# Altium PCB PCB2.PcbDoc
Units mm, origin at the board's own origin, x right, y up, seen from the top; angles counter-clockwise.
Board outline 86 x 54.03 mm, 2 copper layers (Top Layer, Bottom Layer); 73 components, 64 nets, 256 pads, 283 vias.
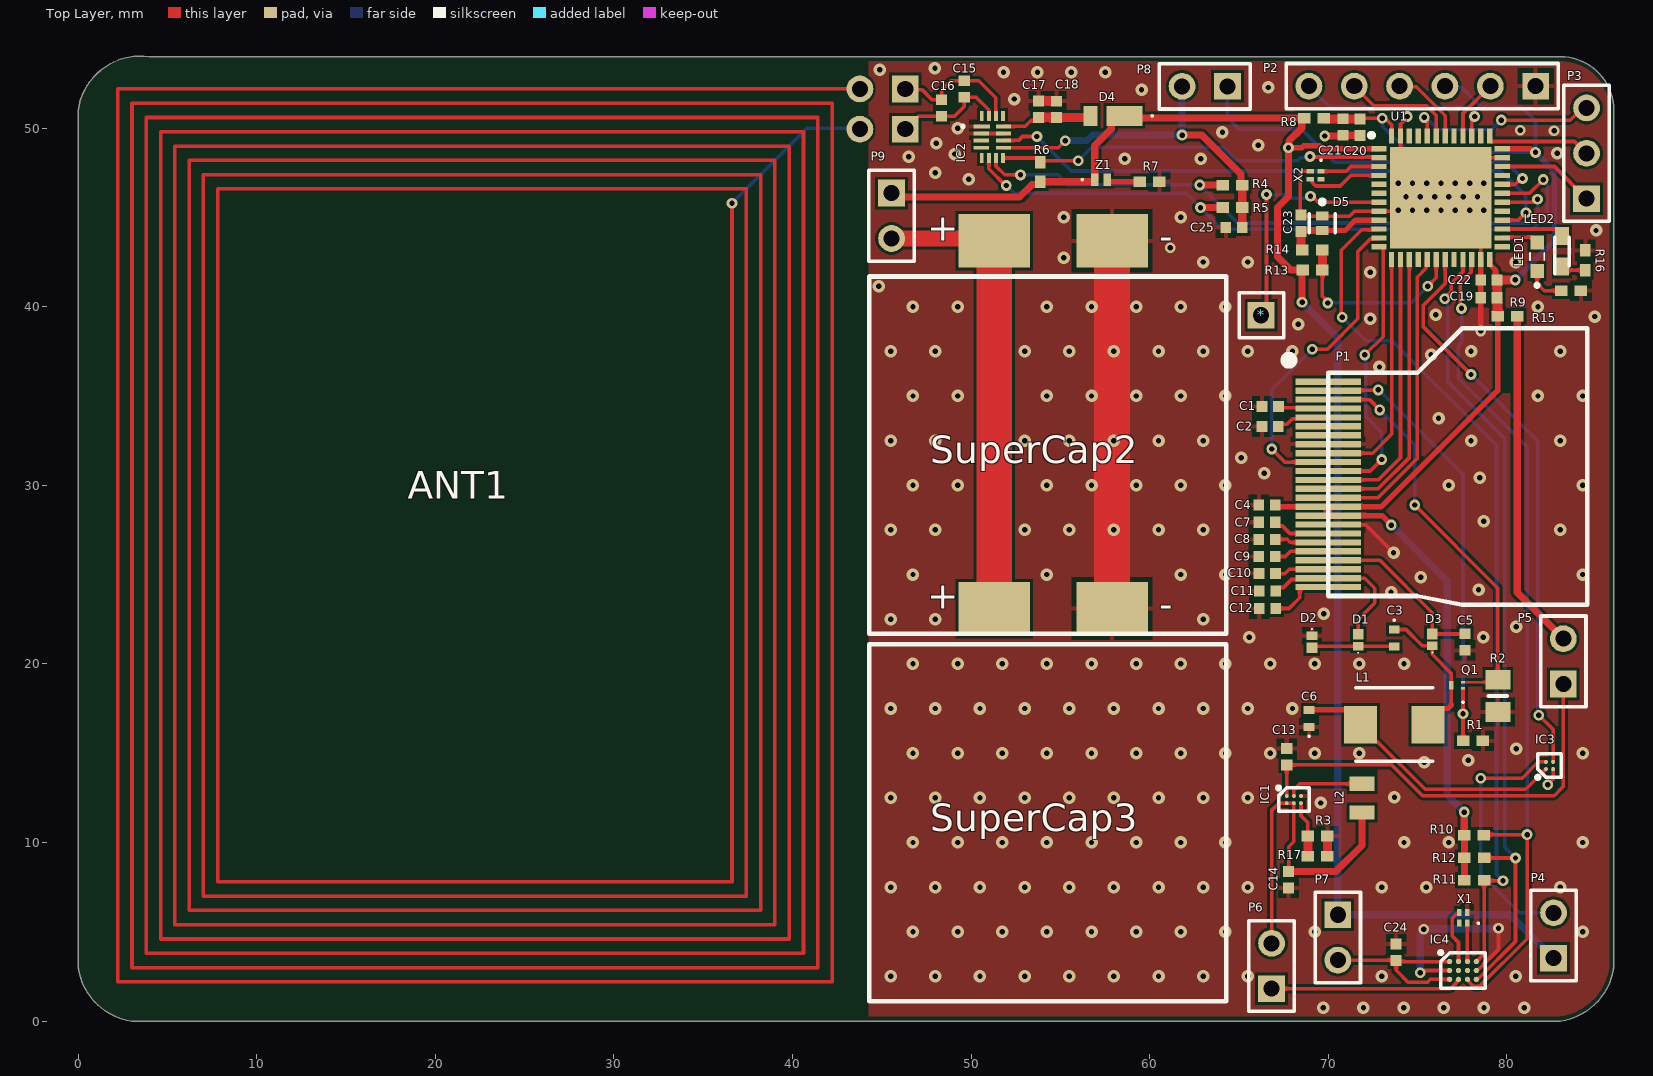
[diagram p0: Top Layer view]
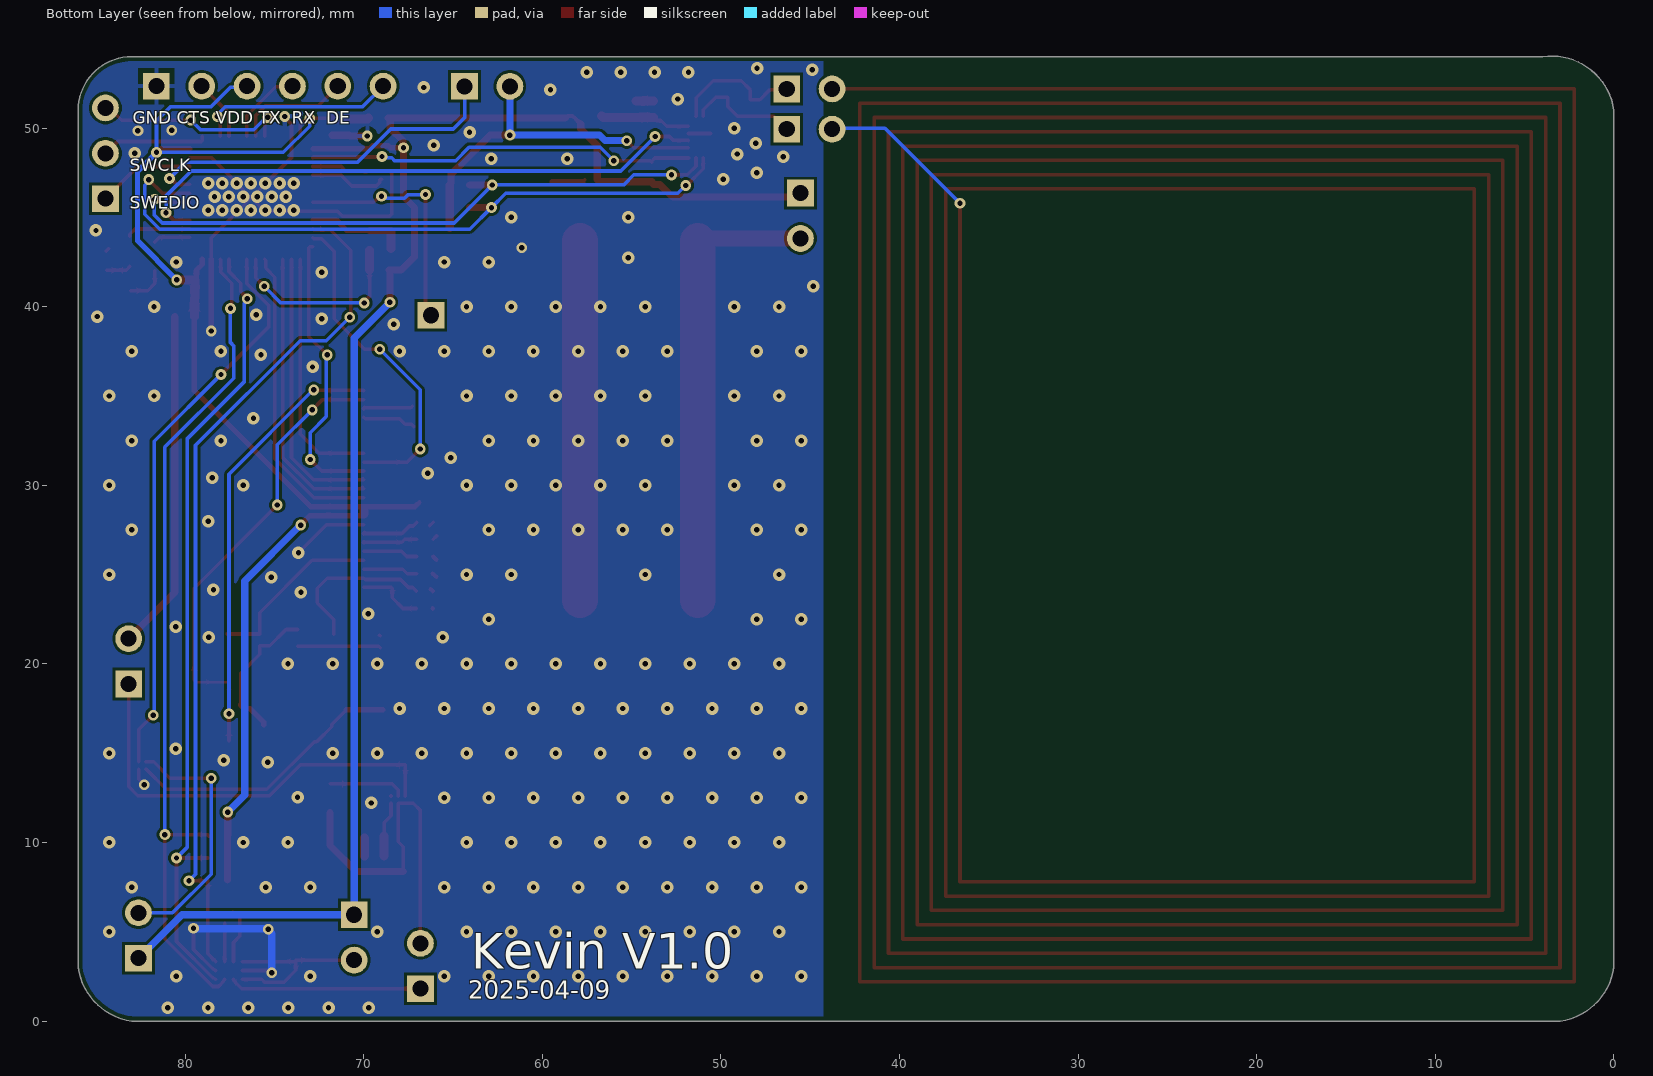
[diagram p1: Bottom Layer view, seen from below]

## Layer stack, top to bottom
Top Solder: solder mask 0.0102, Solder Resist, Dk 3.5
Top Layer: signal copper 0.0356
Dielectric 1: dielectric 0.32, FR-4, Dk 4.8
Bottom Layer: signal copper 0.0356
Bottom Solder: solder mask 0.0102, Solder Resist, Dk 3.5

## Board outline
0,3 ccw(c3.5,3.5) 3,0 83,0 ccw(c82.5,3.5) 86,3 86,51 ccw(c83,51) 83,54 4,54 ccw(c3.5,50.5) 0,51

## Design rules (kind name [scope] priority, off if disabled: settings)
BoardOutlineClearance [All] p1: gap=0.25 ignorepadtopadclearanceinfootprint=FALSE
Clearance [All] p1: gap=0.15 ignorepadtopadclearanceinfootprint=TRUE
ComponentClearance [All] p1: gap=0 collisioncheckmode=3 verticalgap=0 showdistances=FALSE
MinimumAnnularRing [All] p1: minimumring=0.15
MinimumSolderMaskSliver [All] p1: minsoldermaskwidth=0.1
PolygonConnect [All] p1: connectstyle=Relief reliefconductorwidth=0.254 reliefentries=4 polygonreliefangle="90 Angle" airgapwidth=0.254
RoutingVias [All] p1: holewidth=0.3 width=0.5 viastyle="Through Hole" minholewidth=0.2 minwidth=0.4 maxholewidth=0.711 maxwidth=1.27
SilkToSolderMaskClearance [IsPad] p1: minsilkscreentomaskgap=0.15 clearancetoexposedcopper=TRUE
SolderMaskExpansion [All] p1: expansion=0.102 istentingtop=FALSE
Width [All] p1: maxlimit=10 minlimit=0.1 preferedwidth=0.2
27 further rules are at their usual default settings.

## Classes and differential pairs
component class DisplayDrivare: C1 C2 C3 C4 C5 C6 C7 C8 C9 C10 C11 C12 C13 C14 C24 D1 D2 D3 IC1 IC3 IC4 L1 L2 P1 P4 P5 P6 P7 P9 Q1 R1 R2 R3 R10 R11 R12 R17 SuperCap2 X1
component class DigitalBlad: * ANT1 C15 C16 C17 C18 C19 C20 C21 C22 C23 C25 D4 D5 IC2 LED1 LED2 P2 P3 P8 R4 R5 R6 R7 R8 R9 R13 R14 R15 R16 U1 X2 Z1

## Components (designator, comment, footprint, x,y, rotation, side; value= is the part's Value field where it differs from the comment)
* "testpointu desu" Testupoint 64.924,38.153 r0 top
ANT1 "NFC-antenna" Antenna1 2.018,1.993 r0 top
C1 "GRM155R61E105KA12D" CAPC1005X55N 66.76,34.42 r180 top value=1µF
C2 "GRM155R61E105KA12D" CAPC1005X55N 66.75,33.29 r180 top value=1µF
C3 "GRM155C61E475ME15J" GRM15x 73.7,21.45 r270 top value=4.7µF
C4 "GRM155R61E105KA12D" CAPC1005X55N 66.58,28.9 r180 top value=1µF
C5 "GRM155R61E105KA12D" CAPC1005X55N 77.66,21.22 r90 top value=1µF
C6 "GRM155C61E475ME15J" GRM15x 68.93,16.95 r90 top value=4.7µF
C7 "GRM155R61E105KA12D" CAPC1005X55N 66.58,27.93 r180 top value=1µF
C8 "GRM155R61E105KA12D" CAPC1005X55N 66.58,26.97 r180 top value=1µF
C9 "GRM155R61E105KA12D" CAPC1005X55N 66.58,26.01 r180 top value=1µF
C10 "GRM155R61E105KA12D" CAPC1005X55N 66.59,25.05 r180 top value=1µF
C11 "GRM155R61E105KA12D" CAPC1005X55N 66.6,24.08 r180 top value=1µF
C12 "GRM155R61E105KA12D" CAPC1005X55N 66.6,23.1 r180 top value=1µF
C13 "AMK105CBJ106MV-F" CAPC1005X70N 67.68,14.8 r270 top
C14 "AMK105CBJ106MV-F" CAPC1005X70N 67.78,7.91 r90 top
C15 "GRM155C81C474KE01D" CAPC1005X70N 49.62,52.19 r90 top value=0F
C16 "GRM155C81C474KE01D" CAPC1005X70N 48.35,51.13 r90 top value=0F
C17 "C0402C101KCGACAUTO" CAPC1005X70N 53.79,51.06 r270 top
C18 "C0402C101KCMBASJ105SB7474KFNA01GACAUTO" CAPC1005X70N 54.78,51.05 r270 top
C19 "MLAST105SB5104KFNA01" CAPC1005X70N 79,40.5 r180 top
C20 "MLAST105SB5104KFNA01" CAPC1005X70N 71.79,50.05 r270 top
C21 "MLAST105SB5104KFNA01" CAPC1005X70N 70.82,50.06 r270 top
C22 "MLAST105SB5104KFNA01" CAPC1005X70N 79,41.5 r180 top
C23 "VJ0402Y103KXJAC31X" CAPC1005X70N 68.49,44.67 r90 top
C24 "MLAST105SB5104KFNA01" CAPC1005X70N 73.81,3.85 r90 top
C25 "GRM155R61E105KA12D" CAPC1005X55N 64.73,44.43 r180 top value=1µF
D1 "NSR05F30NXT5G" NSR05F30NXT5G 71.68,21.327 r90 top
D2 "NSR05F30NXT5G" NSR05F30NXT5G 69.09,21.24 r270 top
D3 "NSR05F30NXT5G" NSR05F30NXT5G 75.83,21.34 r90 top
D4 "RBE01VYM6AFHTR" RBE01VYM6AFHTR 57.94,50.68 r90 top
D5 "BAS16LD,315" FP-SOD882D-MFG 69.67,44.67 r270 top value=1.5pF
IC1 "MAX17220ENT+T" BGA6C40P3X2_142X89X50 68.08,12.4 r0 top
IC2 "NTP53321G0JHKZ" NTP53321G0JHKZ 51.2,49.5 r0 top
IC3 "TPS22916CYFPR" BGA4C40P2X2_78X78X50 82.4,14.31 r90 top
IC4 "MAX31334EWC+T" BGA12C50P4X3_197X147X69 77.55,2.83 r0 top
L1 "SRP0408F-100M" INDPM4341X80N 73.7,16.6 r0 top
L2 "74479774222" WE-PMI_080562 71.89,12.48 r90 top
LED1 "150060RS55040" 150060RS55040 81.7,42.8 r90 top
LED2 "150060VS55040" LEDM168X50N 83.1,43.1 r90 top
P1 "FPC24(0.5MM)" "FPC24 (0.5mm)" 70,24.3 r0 top locked
P2 "FTDI" HDR1X6 81.62,52.35 r180 top
P3 "Header 3" HDR1X3 84.47,46.05 r90 top
P4 "Header 2" HDR1X2 82.62,3.52 r90 top
P5 "Header 2" HDR1X2 83.17,18.87 r90 top
P6 "Header 2" HDR1X2 66.83,1.81 r90 top
P7 "Header 2" HDR1X2 70.54,5.95 r270 top
P8 "Header 2" HDR1X2 64.36,52.34 r180 top
P9 "Header 2" HDR1X2 45.55,46.36 r270 top
Q1 "CSD17381F4" CSD17381F4 77.225,18.8 r180 top
R1 "CRCW040210K0FKEDHP" RESC1005X40N 78.11,15.69 r180 top
R2 "ERJ-U6QJR47V" RESC2012X65N 79.5,18.2 r90 top
R3 "CRT0402-BY-80R6GLF" RESC1005X40N 69.41,10.36 r180 top
R4 "CRCW04024K70FKEDHP" RESC1005X40N 64.64,46.8 r0 top
R5 "CRCW04024K70FKEDHP" RESC1005X40N 64.64,45.55 r0 top
R6 "CRCW04024K70FKEDHP" RESC1005X40N 53.88,47.55 r270 top
R7 "Generic component" RESC1005X40N 60,47 r0 top
R8 "Generic component" RESC1005X40N 69.2,50.56 r180 top
R9 "Generic component" RESC1005X40N 80.04,39.46 r180 top
R10 "CRCW04024K70FKEDHP" RESC1005X40N 78.17,10.4 r180 top
R11 "Generic component" RESC1005X40N 78.18,7.89 r0 top
R12 "CRCW04024K70FKEDHP" RESC1005X40N 78.18,9.15 r180 top
R13 "Generic component" RESC1005X40N 69.13,42.05 r180 top
R14 "Generic component" RESC1005X40N 69.11,43.18 r0 top
R15 "SFR01MZPJ470" RESC1005X40N 83.6,40.9 r180 top
R16 "SFR01MZPJ470" RESC1005X40N 84.4,42.6 r270 top
R17 "CRT0402-BY-80R6GLF" RESC1005X40N 69.41,9.23 r180 top
SuperCap2 "S-Power 2R" "S-Power 2R" 54.3,41.69 r0 top
SuperCap3 "S-Power 2R" "S-Power 2R" 54.3,21.096 r0 top
U1 "STM32L431CCU6" QFN50P700X700X60-49N-D 76.3,46.1 r0 top
X1 "WMRAG32K76CS2C00R0" WMRAG32K76CS2C00R0 77.56,5.78 r90 top
X2 "WMRAG32K76CS2C00R0" WMRAG32K76CS2C00R0 69.3,47.36 r180 top
Z1 "BZT52C2V7LP-7" BZT52C2V7LP7 57.28,47.12 r0 top

## Footprints (in the part's own frame and the unit in brackets; to place one, negate y for a bottom-side part, rotate by r counter-clockwise, add the part's x,y. Pads: shape width x height; smd on the part's side, far side on the other; paste and mask are expansions set on the pad)
150060RS55040 [mm]
  rect 0.8x0.75 smd: 1(-0.8,0) 2(0.8,0)
  silkscreen extent -1.7,-0.4 0.2,0.4, body extent -0.79,-0.4 0.81,0.4, height 0.4
Antenna1 [mm]
  rect 1.5x1.5 hole 0.9: 0(44.3,50.2) 1(44.3,47.947)
  round 1.5 hole 0.9: ""(41.76,50.2) ""(41.76,47.947)
  Top Layer lines w0.2: 1.8,1.8 38.6,1.8 38.6,47.8 2.6,47.8 2.6,2.6 37.8,2.6 37.8,47 3.4,47 3.4,3.4 37,3.4 37,46.2 4.2,46.2 4.2,4.2 36.2,4.2 36.2,45.4 ; 1.8,1.814 1.8,48.6 39.4,48.6 39.4,1 1,1 1,49.393 40.2,49.393 40.2,0.2 0.2,0.2 0.2,50.2 41.76,50.2 ; 34.6,43.8 34.6,5.8 5.8,5.8 5.8,44.6 35.4,44.6 35.4,5 5,5 5,45.4 36.2,45.4
  Bottom Layer lines w0.2: 34.6,43.8 38.8,48 41.76,48
BGA4C40P2X2_78X78X50 [mm]
  round 0.226 smd: A1(-0.2,0.2) A2(0.2,0.2) B1(-0.2,-0.2) B2(0.2,-0.2)
  silkscreen extent -0.76,-0.66 0.66,0.76, body extent -0.39,-0.39 0.39,0.39, height 0.5
BGA6C40P3X2_142X89X50 [mm]
  round 0.216 smd: A1(-0.4,0.2) A2(0,0.2) A3(0.4,0.2) B1(-0.4,-0.2) B2(0,-0.2) B3(0.4,-0.2)
  silkscreen extent -0.96,-0.66 0.86,0.76, body extent -0.71,-0.44 0.71,0.44, height 0.5
BGA12C50P4X3_197X147X69 [mm]
  round 0.298 smd: A1(-0.75,0.5) A2(-0.25,0.5) A3(0.25,0.5) A4(0.75,0.5) B1(-0.75,0) B2(-0.25,0) B3(0.25,0) B4(0.75,0) C1(-0.75,-0.5) C2(-0.25,-0.5) C3(0.25,-0.5) C4(0.75,-0.5)
  silkscreen extent -1.35,-1 1.25,1.1, body extent -0.98,-0.73 0.98,0.73, height 0.69
BZT52C2V7LP7 [mm]
  rect 0.4x0.7 smd: 1(-0.35,0) 2(0.35,0)
  silkscreen extent -1.1,-0.05 -1,0.05
CAPC1005X55N [mm]
  rect 0.6x0.62 smd: 1(-0.46,0) 2(0.46,0)
  body extent -0.5,-0.25 0.5,0.25, height 0.25
CAPC1005X70N [mm]
  rect 0.6x0.62 smd: 1(-0.46,0) 2(0.46,0)
  body extent -0.5,-0.25 0.5,0.25, height 0.5
CSD17381F4 [mm]
  rect 0.25x0.15 smd: 1(-0.325,0.175) 2(-0.325,-0.175)
  rect 0.25x0.5 smd: 3(0.325,0)
  silkscreen extent -0.37,0.9 -0.28,1, body extent -0.5,-0.3 0.5,0.3, height 0.35
FP-SOD882D-MFG [mm]
  rect 0.5x0.7 smd paste-1000 mask+0: 1(-0.4,0) 2(0.4,0)
  silkscreen extent -1.32,-0.72 0.53,0.72, body extent -0.75,-0.45 0.75,0.45, height 0.25
"FPC24 (0.5mm)" [mm]
  rect 3.67x0.35 smd: 1(0,11.5) 2(0,11) 3(0,10.5) 4(0,10) 5(0,9.5) 6(0,9) 7(0,8.5) 8(0,8) 9(0,7.5) 10(0,7) 11(0,6.5) 12(0,6) 13(0,5.5) 14(0,5) 15(0,4.5) 16(0,4) 17(0,3.5) 18(0,3) 19(0,2.5) 20(0,2) 21(0,1.5) 22(0,1) 23(0,0.5) 24(0,0)
  silkscreen extent -2.42,-1 14.5,14.5
GRM15x [mm]
  rect 0.45x0.6 smd: 1(-0.475,0) 2(0.475,0)
  silkscreen extent -1.05,-0.05 -0.95,0.05, body extent -0.5,-0.28 0.5,0.27, height 0.5
HDR1X2 [mm] "Connector; Header; 2 Position"
  rect 1.5x1.5 hole 0.9: 1(0,0)
  round 1.5 hole 0.9: 2(2.54,0)
  silkscreen extent -1.27,-1.27 3.81,1.27
HDR1X3 [mm] "Connector; Header; 3 Position"
  rect 1.5x1.5 hole 0.9: 1(0,0)
  round 1.5 hole 0.9: 2(2.54,0) 3(5.08,0)
  silkscreen extent -1.27,-1.27 6.35,1.27
HDR1X6 [mm] "Connector; Header; 6 Position"
  rect 1.5x1.5 hole 0.9: 1(0,0)
  round 1.5 hole 0.9: 2(2.54,0) 3(5.08,0) 4(7.62,0) 5(10.16,0) 6(12.7,0)
  silkscreen extent -1.27,-1.27 13.97,1.27
INDPM4341X80N [mm]
  rect 1.85x2.1 smd: 1(-1.9,0) 2(1.9,0)
  silkscreen extent -2.15,-2.05 2.15,2.05, body extent -2.15,-2.05 2.15,2.05, height 0.8
LEDM168X50N [mm]
  rect 1x0.8 smd: 1(-0.85,0) 2(0.85,0)
  silkscreen extent -1.25,-0.4 0.8,0.4, body extent -0.8,-0.4 0.8,0.4, height 0.4
NSR05F30NXT5G [mm]
  rect 0.47x0.6 smd: 1(-0.333,0)
  rect 0.6x0.6 smd: 2(0.333,0)
  silkscreen extent -0.71,0 -0.7,0, body extent -0.47,-0.3 0.53,0.3, height 0.31
NTP53321G0JHKZ [mm]
  rect 0.9x0.22 smd: 1(-0.6,0.6)
  rect 0.85x0.22 smd: 2(-0.625,0.2) 3(-0.625,-0.2) 4(-0.625,-0.6) 9(0.625,-0.6) 10(0.625,-0.2) 11(0.625,0.2) 12(0.625,0.6)
  rect 0.22x0.55 smd: 5(-0.6,-1.175) 6(-0.2,-1.175) 7(0.2,-1.175) 8(0.6,-1.175) 13(0.6,1.175) 14(0.2,1.175) 15(-0.2,1.175) 16(-0.6,1.175)
  silkscreen extent -1.7,0.55 -1.6,0.65, body extent -0.9,-1.3 0.9,1.3, height 0.6
QFN50P700X700X60-49N-D [mm]
  rect 0.85x0.3 smd: 1(-3.45,2.75) 2(-3.45,2.25) 3(-3.45,1.75) 4(-3.45,1.25) 5(-3.45,0.75) 6(-3.45,0.25) 7(-3.45,-0.25) 8(-3.45,-0.75) 9(-3.45,-1.25) 10(-3.45,-1.75) 11(-3.45,-2.25) 12(-3.45,-2.75) 25(3.45,-2.75) 26(3.45,-2.25) 27(3.45,-1.75) 28(3.45,-1.25) 29(3.45,-0.75) 30(3.45,-0.25) 31(3.45,0.25) 32(3.45,0.75) 33(3.45,1.25) 34(3.45,1.75) 35(3.45,2.25) 36(3.45,2.75)
  rect 0.3x0.85 smd: 13(-2.75,-3.45) 14(-2.25,-3.45) 15(-1.75,-3.45) 16(-1.25,-3.45) 17(-0.75,-3.45) 18(-0.25,-3.45) 19(0.25,-3.45) 20(0.75,-3.45) 21(1.25,-3.45) 22(1.75,-3.45) 23(2.25,-3.45) 24(2.75,-3.45) 37(2.75,3.45) 38(2.25,3.45) 39(1.75,3.45) 40(1.25,3.45) 41(0.75,3.45) 42(0.25,3.45) 43(-0.25,3.45) 44(-0.75,3.45) 45(-1.25,3.45) 46(-1.75,3.45) 47(-2.25,3.45) 48(-2.75,3.45)
  rect 5.7x5.7 smd: 49(0,0)
  silkscreen extent -4,3.38 -3.75,3.62, body extent -3.55,-3.55 3.55,3.55, height 0.6
RBE01VYM6AFHTR [mm]
  rect 1.1x2 smd: 1(0,-0.65)
  rect 1.1x0.8 smd: 2(0,1.25)
  silkscreen extent -0.05,-2.25 0.05,-2.15, body extent -0.7,-1.25 0.7,1.25, height 0.8
RESC1005X40N [mm]
  rect 0.7x0.6 smd: 1(-0.55,0) 2(0.55,0)
  body extent -0.5,-0.25 0.5,0.25, height 0.4
RESC2012X65N [mm]
  rect 1.1x1.4 smd: 1(-0.9,0) 2(0.9,0)
  silkscreen extent 0,-0.52 0,0.52, body extent -1,-0.63 1,0.63, height 0.65
"S-Power 2R" [mm]
  rect 4x3 smd: 1(-3,2) 2(3.6,2)
  silkscreen extent -10,-20 10,0
Testupoint [mm]
  rect 1.5x1.5 hole 0.9: 0(1.319,1.369)
  silkscreen extent 0.1,0.1 2.59,2.64
WE-PMI_080562 [mm]
  rect 0.8x1.4 smd: 1(-0.8,0) 2(0.8,0)
  body extent -1,-0.63 1,0.63, height 0.6
WMRAG32K76CS2C00R0 [mm]
  rect 0.4x0.25 smd: 1(-0.3,-0.225) 2(0.3,-0.225) 3(0.3,0.225) 4(-0.3,0.225)
  silkscreen extent -0.35,-0.9 -0.25,-0.8, body extent -0.48,-0.33 0.48,0.33, height 0.45

## Part data
C1 C2 C4 C5 C7 C8 C9 C10 C11 C12 C25: library part CMP-001-00126-1, "Capacitor", Manufacturer_Name="Murata Electronics", Mouser Part Number=81-GRM155R61E105KA2D, Rated Voltage="25 VDC", Arrow Part Number=GRM155R61E105KA12D, Arrow Price/Stock=https://www.arrow.com/en/products/grm155r61e105ka12d/murata-manufacturing?region=nac, Datasheet Link=https://search.murata.co.jp/Ceramy/image/img/A01X/G101/ENG/GRM155R61E105KA12-01A.pdf, Design Item ID=GRM155R61E105KA12D, Height=0.55mm, Manufacturer_Part_Number=GRM155R61E105KA12D, Mouser Price/Stock=https://www.mouser.co.uk/ProductDetail/Murata-Electronics/GRM155R61E105KA12D?qs=hiffU4J9V6bE4a81t2Mv5A%3D%3D, Source=SamacSys.SchLib
C3 C6: library part CMP-001-00127-1, "Capacitor", Manufacturer_Name="Murata Electronics", Mouser Part Number=81-GRM15C61E475ME15J, Rated Voltage="25 VDC", Arrow Part Number=GRM155C61E475ME15J, Arrow Price/Stock=https://www.arrow.com/en/products/grm155c61e475me15j/murata-manufacturing?region=nac, Datasheet Link=https://search.murata.co.jp/Ceramy/image/img/A01X/G101/ENG/GRM155C61E475ME15-01A.pdf, Design Item ID=GRM155C61E475ME15J, Height=0.5mm, Manufacturer_Part_Number=GRM155C61E475ME15J, Mouser Price/Stock=https://www.mouser.co.uk/ProductDetail/Murata-Electronics/GRM155C61E475ME15J?qs=By6Nw2ByBD02p8xq06vhEQ%3D%3D, Source=SamacSys.SchLib
C13 C14: library part "Generic capacitor", "Multilayer Ceramic Capacitors MLCC - SMD/SMT 4V 10uF X5R 0402 20 %", Capacitance=10uF, ComponentLink1Description="New link", ComponentLink1URL=https://www.mouser.se/ProductDetail/TAIYO-YUDEN/AMK105CBJ106MV-F?qs=sGAEpiMZZMsh%252B1woXyUXj0Cks%252BXuBt5iPLxjTe7mki8%3D
C15 C16: library part CMP-001-00140-1, "Multilayer Ceramic Capacitors MLCC - SMD/SMT", Manufacturer_Name="Murata Electronics", Mouser Part Number=81-GRM155C81C474KE1D, Datasheet Link=https://search.murata.co.jp/Ceramy/image/img/A01X/G101/ENG/GRM155C81C474KE01-01A.pdf, Design Item ID=GRM155C81C474KE01D, Height=0.7mm, Manufacturer_Part_Number=GRM155C81C474KE01D, Mouser Price/Stock=https://www.mouser.com/Search/Refine.aspx?Keyword=81-GRM155C81C474KE1D, Source=SamacSys.SchLib
C17: library part "Generic capacitor", "Multilayer Ceramic Capacitors MLCC - SMD/SMT 500V 0.0001uF C0G 0402 10% AEC-Q200", Capacitance=100pF, ComponentLink1Description="New link", ComponentLink1URL=https://www.mouser.se/ProductDetail/KEMET/C0402C101KCGACAUTO?qs=1Kr7Jg1SGW8kQysZZQPmCw%3D%3D
C18: library part "Generic capacitor", "Multilayer Ceramic Capacitors MLCC - SMD/SMT 500V 0.0001uF C0G 0402 10% AEC-Q200", Capacitance=0.47uF, ComponentLink1Description="New link", ComponentLink1URL=https://www.mouser.se/ProductDetail/TAIYO-YUDEN/MBASJ105SB7474KFNA01?qs=tlsG%2FOw5FFh70%252Bw5vm%252Bxgg%3D%3D
C19: library part "Generic capacitor", "Multilayer Ceramic Capacitors MLCC - SMD/SMT 6.3V 4.7uF X5R 0402 20% Medical", Capacitance=4.7uF, ComponentLink1Description="New link", ComponentLink1URL=https://www.mouser.se/ProductDetail/TAIYO-YUDEN/MLASJ105BB5475MFNA01?qs=sGAEpiMZZMsh%252B1woXyUXj3XUfju0vRpjpyIV14TsoXE%3D
C20 C21 C22 C24: library part "Generic capacitor", "Multilayer Ceramic Capacitors MLCC - SMD/SMT 25V 0.1uF X5R 0402 10% Medical", Capacitance=100nF, ComponentLink1Description="New link", ComponentLink1URL=https://www.mouser.se/ProductDetail/TAIYO-YUDEN/MLAST105SB5104KFNA01?qs=sGAEpiMZZMsh%252B1woXyUXj3XUfju0vRpjIEu19pL458I%3D
C23: library part "Generic capacitor", "Multilayer Ceramic Capacitors MLCC - SMD/SMT 0402 10nF 16volts X7R 10%", Capacitance=10nF, ComponentLink1Description="New link", ComponentLink1URL=https://www.mouser.se/ProductDetail/Vishay-Vitramon/VJ0402Y103KXJAC31X?qs=sGAEpiMZZMsh%252B1woXyUXj7JttxwcgSfbi%2FPlga%252BwiEM%3D
D1 D2 D3: library part CMP-004-00034-1, "Schottky Diode", Manufacturer_Name=onsemi, Mouser Part Number=863-NSR05F30NXT5G, Arrow Part Number=NSR05F30NXT5G, Arrow Price/Stock=https://www.arrow.com/en/products/nsr05f30nxt5g/on-semiconductor?region=nac, Datasheet Link=https://www.onsemi.com/pub/Collateral/NSR05F30.PDF, Design Item ID=NSR05F30NXT5G, Height=0.31mm, Manufacturer_Part_Number=NSR05F30NXT5G, Mouser Price/Stock=https://www.mouser.co.uk/ProductDetail/onsemi/NSR05F30NXT5G?qs=Ddzdinyxz%2FkBCezibUxhIA%3D%3D, Source=SamacSys.SchLib
D4: library part CMP-004-00062-1, "DIODE SCHOTTKY 6V 100MA TUMD2M", Manufacturer_Name="ROHM Semiconductor", Mouser Part Number=755-RBE01VYM6AFHTR, Datasheet Link=https://www.digikey.ph/en/products/detail/rohm-semiconductor/RBE01VYM6AFHTR/24634517, Design Item ID=RBE01VYM6AFHTR, Height=0.8mm, Manufacturer_Part_Number=RBE01VYM6AFHTR, Mouser Price/Stock=https://www.mouser.co.uk/ProductDetail/ROHM-Semiconductor/RBE01VYM6AFHTR?qs=VVKQmw408U8czvswzPLZtQ%3D%3D, Source=SamacSys.SchLib
D5: library part CMP-14399-000004-1, "DIODE GP 100V 215MA SOD882D", Ambient Temperature Range High=+150°C, Ambient Temperature Range Low=-55°C, Capacitance=1.5pF, Forward Current=215mA, Manufacturer=Nexperia, Max Repetitive Reverse Voltage=100V, Max Surge Forward Current=0.5A, Package=SOD882D, Peak Reverse Current=0.5uA, Temperature="to +150°C", Automotive=Yes, Automotive Grade="Grade 0", Category=Diode, ComponentLink2Description=Datasheet, ComponentLink2URL=https://assets.nexperia.com/documents/data-sheet/BAS16LD.pdf, Device Class L1="Discrete Semiconductors", Device Class L2=Diodes, Device Class L3="Rectifier Diodes", Digikey Description="DIODE GP 100V 215MA SOD882D", Footprint Url=https://assets.nexperia.com/documents/outline-drawing/SOD882D.pdf, Height=0.4mm, Lead Free=Yes, Manufacturer Part Number=BAS16LD,315, Max Junction Temp=+150°C, Mouser Description="BAS16LD - Single high-speed switching diode", Octopart=https://octopart.com/bas16ld%2C315-nexperia-78753474, Reverse Voltage=100V, RoHS=TRUE, Temperature Range High=+150°C
IC1: library part CMP-031-00089-1, "MAXIM INTEGRATED PRODUCTS - MAX17220ENT+T - DC-DC Switching Step Up Regulator", Manufacturer_Name="Analog Devices", Mouser Part Number=700-MAX17220ENT+T, Supplier Part Number=594-MCS04020D8062BE0, Arrow Part Number=MAX17220ENT+T, Arrow Price/Stock=https://www.arrow.com/en/products/max17220entt/analog-devices?region=nac, Datasheet Link=https://www.analog.com/MAX17220/datasheet, Design Item ID=MAX17220ENT+T, Height=0.5mm, Manufacturer_Part_Number=MAX17220ENT+T, Mouser Price/Stock=https://www.mouser.co.uk/ProductDetail/Analog-Devices-Maxim-Integrated/MAX17220ENT%2bT?qs=BZBei1rCqCAO5QX%2FSv6p6w%3D%3D, Source=SamacSys.SchLib, Supplier=Mouser
IC2: library part CMP-031-00011-1, "Interface - Specialized NTAG", Manufacturer_Name=NXP, Mouser Part Number=771-NTP53321G0JHKZ, Arrow Part Number=NTP53321G0JHKZ, Arrow Price/Stock=https://www.arrow.com/en/products/ntp53321g0jhkz/nxp-semiconductors?region=nac, Datasheet Link=https://www.nxp.com/docs/en/data-sheet/NTP53x2.pdf, Design Item ID=NTP53321G0JHKZ, Height=0.5mm, Manufacturer_Part_Number=NTP53321G0JHKZ, Mouser Price/Stock=https://www.mouser.co.uk/ProductDetail/NXP-Semiconductors/NTP53321G0JHKZ?qs=u16ybLDytRYy2Rt%2Fib73Dw%3D%3D, Source=SamacSys.SchLib
IC3: library part CMP-031-00019-1, "TPS22916 5.5-V", Manufacturer_Name="Texas Instruments", Mouser Part Number=595-TPS22916CYFPR, Arrow Part Number=TPS22916CYFPR, Arrow Price/Stock=https://www.arrow.com/en/products/tps22916cyfpr/texas-instruments?utm_currency=USD&region=nac, Datasheet Link=http://www.ti.com/lit/gpn/tps22916, Design Item ID=TPS22916CYFPR, Height=0.5mm, Manufacturer_Part_Number=TPS22916CYFPR, Mouser Price/Stock=https://www.mouser.co.uk/ProductDetail/Texas-Instruments/TPS22916CYFPR?qs=EU6FO9ffTweddKR4NsfVQg%3D%3D, Source=SamacSys.SchLib
IC4: library part CMP-031-00017-1, "Ultra-Low-Power Real Time Clock with Integrated Power Switch", Manufacturer_Name="Analog Devices", Mouser Part Number=700-MAX31334EWC+T, Arrow Part Number=MAX31334EWC+T, Arrow Price/Stock=https://www.arrow.com/en/products/max31334ewct/analog-devices?region=nac, Datasheet Link=https://www.analog.com/MAX31334/datasheet, Design Item ID=MAX31334EWC+T, Height=0.69mm, Manufacturer_Part_Number=MAX31334EWC+T, Mouser Price/Stock=https://www.mouser.co.uk/ProductDetail/Analog-Devices-Maxim-Integrated/MAX31334EWC%2bT?qs=vvQtp7zwQdOckJhTSGVMeA%3D%3D, Source=SamacSys.SchLib
L1: library part CMP-006-00031-1, "Inductor-BOURNS", Rating="10uH 1A", Design Item ID=SRP0408F-100M, Source=SamacSys.SchLib
L2: library part CMP-006-00060-1, "Inductor-WE", Rating="2.2uH 700mA", Design Item ID=74479774222, Source=Schlib.SchLib
LED1: library part CMP-007-00073-1, "RED Standard LEDs - SMD WL-SMCD SMD MonoChip 0603 Red 632nm", Manufacturer_Name="Wurth Elektronik", Mouser Part Number=710-150060RS55040, Datasheet Link=http://katalog.we-online.de/led/datasheet/150060RS55040.pdf, Design Item ID=150060RS55040, Height=0mm, Manufacturer_Part_Number=150060RS55040, Mouser Price/Stock=https://www.mouser.co.uk/ProductDetail/Wurth-Elektronik/150060RS55040?qs=8Aam6%252B7C6HHnMZFlrlTntA%3D%3D, Source=SamacSys.SchLib
LED2: library part CMP-007-00074-1, "Green LED", Manufacturer_Name="Wurth Elektronik", Mouser Part Number=710-150060VS55040, Datasheet Link=https://katalog.we-online.com/led/datasheet/150060VS55040.pdf, Design Item ID=150060VS55040, Height=0.5mm, Manufacturer_Part_Number=150060VS55040, Mouser Price/Stock=https://www.mouser.co.uk/ProductDetail/Wurth-Elektronik/150060VS55040?qs=8Aam6%252B7C6HEumg%252B0cJZzvA%3D%3D, Source=SamacSys.SchLib
P1: "No Description Available", Mfr_Name="Molex Connector Corporation", RefDes=RefDes, Type=Type
P2: library part CMP-002-00359-1, "Header, 6-Pin", Component Type=Standard, Design Item ID="Header 6", LatestRevisionDate=17-Jul-2002, LatestRevisionNote="Re-released for DXP Platform.", Pins=6, Publisher="Altium Limited", Source="Miscellaneous Connectors.SchLib"
P3: library part CMP-002-00163-1, "Header, 3-Pin", Component Type=Standard, Design Item ID="Header 3", LatestRevisionDate=17-Jul-2002, LatestRevisionNote="Re-released for DXP Platform.", Pins=3, Publisher="Altium Limited", Source="Miscellaneous Connectors.SchLib"
P4 P5 P6 P7 P8 P9: library part CMP-002-00143-1, "Header, 2-Pin", Component Type=Standard, Design Item ID="Header 2", LatestRevisionDate=17-Jul-2002, LatestRevisionNote="Re-released for DXP Platform.", Pins=2, Publisher="Altium Limited", Source="Miscellaneous Connectors.SchLib"
Q1: library part CMP-102-000001-1, "MOSFET (N-Channel)", Manufacturer_Name="Texas Instruments", Mouser Part Number=595-CSD17381F4, Datasheet Link=https://www.ti.com/lit/gpn/csd17381f4?HQS=ti-null-null-sf-df-pf-sep-wwe&DCM=yes?hkey=EF798316E3902B6ED9A73243A3159BB0, Design Item ID=CSD17381F4, Height=0.36mm, Manufacturer_Part_Number=CSD17381F4, Mouser Price/Stock=https://www.mouser.co.uk/ProductDetail/Texas-Instruments/CSD17381F4?qs=aG%252B9dtamCDf9%2FrYwJezivw%3D%3D, Source=SamacSys.SchLib
R1: library part CMP-009-00221-1, "CRCW Power Resistor 0402 0.063W 10K Vishay CRCW Series Thick Film Power Resistor 0402 Case 10k +/-1% 0.125W +/-100ppm/K", Manufacturer_Name=Vishay, Mouser Part Number=71-CRCW040210K0FKEDH, Resistance=10k, Arrow Part Number=CRCW040210K0FKEDHP, Arrow Price/Stock=https://www.arrow.com/en/products/crcw040210k0fkedhp/vishay?utm_currency=USD&region=nac, Datasheet Link=http://www.vishay.com/docs/20035/dcrcwe3.pdf, Design Item ID=CRCW040210K0FKEDHP, Height=0.4mm, Manufacturer_Part_Number=CRCW040210K0FKEDHP, Mouser Price/Stock=https://www.mouser.co.uk/ProductDetail/Vishay-Dale/CRCW040210K0FKEDHP?qs=FlFvgi4rxBxmIiaeyFjrkA%3D%3D, Source=SamacSys.SchLib
R2: library part CMP-009-00220-1, "Thick Film Resistors - SMD 0805 0.25W 5% .47ohms AEC-Q200", Manufacturer_Name=Panasonic, Mouser Part Number=667-ERJ-U6QJR47V, Resistance=470m, Datasheet Link=https://industrial.panasonic.com/cdbs/www-data/pdf/RDP0000/AOA0000C334.pdf, Design Item ID=ERJ-U6QJR47V, Height=0.65mm, Manufacturer_Part_Number=ERJ-U6QJR47V, Mouser Price/Stock=https://www.mouser.co.uk/ProductDetail/Panasonic/ERJ-U6QJR47V?qs=5aG0NVq1C4wLyK2PwyO%252BIA%3D%3D, Source=SamacSys.SchLib
R3 R17: library part "Generic resistor", "Thin Film Resistors 1/16watts 80.6 ohm 0.10%", Resistance=np, ComponentLink1Description="New link", ComponentLink1URL=https://www.mouser.se/ProductDetail/Bourns/CRT0402-BY-80R6GLF?qs=sGAEpiMZZMvdGkrng054tyoJODJe%252BCGW7Yc230%2FWBYo%3D
R4 R5 R6 R10 R12: library part CMP-009-00230-1, "CRCW Power Resistor 0402 0.063W 4K7 Vishay CRCW Series Thick Film Power Resistor 0402 Case 4.7k +/-1% 0.125W +/-100ppm/K", Manufacturer_Name=Vishay, Mouser Part Number=71-CRCW04024K70FKEDH, Resistance=4.7k, Arrow Part Number=CRCW04024K70FKEDHP, Arrow Price/Stock=https://www.arrow.com/en/products/crcw04024k70fkedhp/vishay?utm_currency=USD&region=nac, Datasheet Link=http://www.vishay.com/docs/20035/dcrcwe3.pdf, Design Item ID=CRCW04024K70FKEDHP, Height=0.4mm, Manufacturer_Part_Number=CRCW04024K70FKEDHP, Mouser Price/Stock=https://www.mouser.co.uk/ProductDetail/Vishay-Dale/CRCW04024K70FKEDHP?qs=k2%2FDWSARqgH3ASlI4vM3KQ%3D%3D, Source=SamacSys.SchLib
R7: library part "Generic resistor", Resistance=0, ComponentLink1Description="New link"
R8 R9 R13: library part "Generic resistor", Resistance=np, ComponentLink1Description="New link"
R11: library part "Generic resistor", Resistance=10k, ComponentLink1Description="New link"
R14: library part "Generic resistor", "Thick Film Resistors 1/16watt 10Kohms 1% Commercial Use", Resistance=10k, ComponentLink1Description="New link", ComponentLink1URL=https://www.mouser.se/ProductDetail/Vishay-Dale/CRCW040210K0FKEDC?qs=sGAEpiMZZMvdGkrng054t0DrEhLhGh8ghRTPC4LoFoV0V5heIyAs3Q%3D%3D
R15 R16: library part "Generic resistor", "Thick Film Resistors Sulfur Tolerant Chip Resistors 0402 case size", Resistance=47, ComponentLink1Description="New link", ComponentLink1URL=https://www.mouser.se/ProductDetail/ROHM-Semiconductor/SFR01MZPJ470?qs=sGAEpiMZZMvdGkrng054t2cqbZCzJY7NKh3gUwXOa5kuN5TNJ%252Bi2TA%3D%3D
SuperCap2 SuperCap3: library part CMP-111-000001-1, Design Item ID="S-Power 2R", Source=Schlib.SchLib
U1: library part CMP-031-00018-1, "ARM Microcontrollers - MCU 16/32-BITS MICROS", Manufacturer_Name=STMicroelectronics, Mouser Part Number=511-STM32L431CCU6, Arrow Part Number=STM32L431CCU6, Arrow Price/Stock=https://www.arrow.com/en/products/stm32l431ccu6/stmicroelectronics?region=nac, Datasheet Link=http://www.st.com/content/ccc/resource/technical/document/datasheet/group3/83/b3/60/f6/b1/cc/47/7e/DM00257211/files/DM00257211.pdf/jcr:content/translations/en.DM00257211.pdf, Design Item ID=STM32L431CCU6, Height=0.6mm, Manufacturer_Part_Number=STM32L431CCU6, Mouser Price/Stock=https://www.mouser.co.uk/ProductDetail/STMicroelectronics/STM32L431CCU6?qs=U58vgkJzipRWiXTJcDrRbg%3D%3D, Source=SamacSys.SchLib
X1 X2: library part CMP-003-00031-1, "32.768 kHz +/-20ppm Crystal 8pF 75 kOhms 4-SMD", Manufacturer_Name="Murata Electronics", Mouser Part Number=81-WMRAG32K76CS2C00R, Datasheet Link=https://www.murata.com/products/productdata/8804604674078/SPEC-WMRAG32K76CS2C00R0.pdf, Design Item ID=WMRAG32K76CS2C00R0, Height=0.35mm, Manufacturer_Part_Number=WMRAG32K76CS2C00R0, Mouser Price/Stock=https://www.mouser.co.uk/ProductDetail/Murata-Electronics/WMRAG32K76CS2C00R0?qs=bZr6mbWTK5kWV2uyypDEfg%3D%3D, Source=SamacSys.SchLib
Z1: library part CMP-004-00065-1, "Zener Diode 2.7 V 250 mW +/-7% Surface Mount DFN1006-2", Manufacturer_Name="Diodes Incorporated", Mouser Part Number=621-BZT52C2V7LP-7, Arrow Part Number=BZT52C2V7LP-7, Arrow Price/Stock=https://www.arrow.com/en/products/bzt52c2v7lp-7/diodes-incorporated?utm_currency=USD&region=nac, Datasheet Link=https://www.diodes.com/assets/Datasheets/BZT52C2V4LP-BZT52C39LP.pdf, Design Item ID=BZT52C2V7LP-7, Height=0.53mm, Manufacturer_Part_Number=BZT52C2V7LP-7, Mouser Price/Stock=https://www.mouser.co.uk/ProductDetail/Diodes-Incorporated/BZT52C2V7LP-7?qs=DwnLFiA34IIEhdzEy1XKTQ%3D%3D, Source=SamacSys.SchLib

## Via types
v1: diameter 0.7, hole 0.3, Top Layer to Bottom Layer, tented both sides, 228 vias
v2: diameter 0.6, hole 0.3, Top Layer to Bottom Layer, 49 vias
v3: diameter 0.6, hole 0.3, Top Layer to Bottom Layer, tented both sides, 6 vias

## Nets (pads, with @x,y where several pads share a name; then routed paths per layer and width w, separated by ;. In a path a pad name is that pad's centre, name@x,y a point inside that pad or via, vN(x,y) a via of type N, cw(c..) or ccw(c..) an arc to the next point about the centre after c; other vN are vias at no path point)
3V: P5.2 R9.1 | length 19.1
  Top Layer w0.4: R9.1 80.59,23.99 P5.2
A_en: R13.1 R14.2 U1.18 | length 10.8
  Top Layer w0.2: R14.2 R14.2@69.68,43.16 ; R13.1 69.68,40.581 69.97,40.291 v2(69.97,40.21) ; v2(75.583,41.147) 76.05,41.614 U1.18
  Top Layer w0.5: R13.1 R14.2@69.68,43.16
  Bottom Layer w0.2: v2(69.97,40.21) 74.646,40.21 v2(75.583,41.147)
alarmA: IC4.A4 R11.2 U1.10 | length 48.3
  Top Layer w0.2: v2(70.79,39.41) 70.74,39.46 70.74,43.16 71.88,44.3 72.8,44.3 U1.10 ; IC4.A4 78.73,3.76 R11.2 78.76,7.86 v2(79.79,7.86)
  Bottom Layer w0.2: v2(70.79,39.41) 72.1,38.1 73.56,38.1 79.425,32.235 79.425,8.225 v2(79.79,7.86)
ANT+: ANT1.0 C15.2 C16.2 IC2.14 | length 7.5
  Top Layer w0.2: ANT1.0 46.352,52.159 47.251,52.159 47.82,51.59 C16.2@48.36,51.59 ; C16.2 48.35,52.13 48.87,52.65 C15.2 ; C15.2@49.63,52.65 50.44,52.65 51.39,51.7 51.39,50.685 IC2.14
ANT-: ANT1.1 C15.1 C16.1 IC2.15 | length 6.4
  Top Layer w0.2: ANT1.1 47.048,50.67 49.08,50.67 49.62,51.21 C15.1 50.284,51.73 50.99,51.024 50.99,50.685 IC2.15
BOOT0: P3.3 U1.44 | length 11
  Top Layer w0.2: v2(75.375,50.6) 75.375,50.492 75.55,50.317 U1.44 ; v2(79.697,50.449) 83.552,50.449 84.233,51.13 P3.3
  Bottom Layer w0.2: v2(75.375,50.6) 75.468,50.6 76.168,49.9 79.148,49.9 v2(79.697,50.449)
BUSY: P1.9 U1.13 | length 13.8
  Top Layer w0.2: P1.9 72.5,31.8 73.55,32.85 U1.13
CS: P1.12 U1.14 | length 15.7
  Top Layer w0.2: P1.12 P1.12@70.075,30.375 ; P1.12@70.075,30.3 72.8,30.3 74.05,31.55 U1.14
D/C: P1.11 U1.12 | length 16.2
  Top Layer w0.2: P1.11 72.361,30.8 v2(73.003,31.443) ; v2(72.05,37.3) 73.076,38.326 73.076,43.3 73.026,43.35 U1.12
  Bottom Layer w0.2: v2(72.05,37.3) 72.098,37.252 72.098,33.855 73.003,32.949 v2(73.003,31.443)
Disp_ON: IC3.B2 U1.19 | length 31.7
  Top Layer w0.2: U1.19 76.55,41.3 75.336,40.086 75.336,38.864 v2(78,36.2) ; v2(81.79,17.13) 82.6,16.32 IC3.B2
  Bottom Layer w0.2: v2(78,36.2) 81.74,32.46 81.74,17.18 v2(81.79,17.13)
ED: IC2.8 R6.1 U1.2 | length 21.9
  Top Layer w0.2: IC2.8 53.705,48.325 R6.1@53.88,48.15 ; R6.1 53.96,48.18 v2(56.01,48.18) ; v2(68.986,48.412) 69.018,48.381 72.819,48.381 U1.2
  Bottom Layer w0.2: v2(56.01,48.18) 56.76,48.93 59.54,48.93 59.543,48.933 64.107,48.933 64.86,48.18 68.286,48.18 68.442,48.336 68.91,48.336 v2(68.986,48.412)
EH: C17.2 C18.2 D4.2 IC2.12 | length 5.1
  Top Layer w0.2: IC2.12 53.03,50.1 53.343,50.413 53.603,50.413 C17.2 ; C18.2@54.77,50.6 C18.2
  Top Layer w0.5: C17.2 C18.2@54.77,50.6 ; C18.2 56.6,50.59 D4.2
GDR: P1.2 Q1.1 R1.2 | length 25.7
  Top Layer w0.2: P1.2 70.02,35.32 72.79,35.32 v2(72.81,35.339) ; Q1.1@77.55,18.565 77.55,17.76 v2(77.55,17.21) 77.55,15.7 R1.2
  Bottom Layer w0.2: v2@72.88,35.29 77.55,30.62 v2(77.55,17.21)
GND: C1.2 C2.2 C4.2 C5.1 C6.1 C7.2 C8.2 C9.2 C10.2 C11.2 C12.2 C13.1 C14.1 C17.1 C18.1 C19.2 C20.2 C21.2 C22.2 C23.2 C24.2 C25.2 D2.1 D5.1 IC1.A3 IC2.1 IC2.2 IC2.11 IC3.B1 IC4.B1 IC4.B4 P1.8 P1.17 P2.1 R1.1 R2.1 R3.1 R7.2 R15.1 R16.1 R17.1 SuperCap2.2 SuperCap3.2 U1.8 U1.23 U1.35 U1.47 U1.49 X1.2 X2.2 | length 73.5
  Top Layer w0.2: IC2.2 IC2.11 ; C17.1@53.779,51.509 C17.1 ; C18.1@54.77,51.52 C18.1 ; SuperCap3.2@57.88,23.54 SuperCap3.2@57.9,23.56 ; C8.2@65.93,27.16 C8.2 ; C9.2@66.077,25.967 C9.2 ; C7.2 C7.2@66.32,27.73 ; C11.2@66.13,24.09 C11.2 ; IC1.A3 IC1.A3@68.483,12.597 ; X2.2 68.557,47.585 68.44,47.468 68.44,45.18 C23.2 68.55,45.07 D5.1 71.192,45.07 71.472,45.35 73.92,45.35 74.72,45.35 75.55,45.35 U1.49 ; D2.1 D2.1@69.123,21.606 ; R3.1@69.906,10.306 R3.1@69.96,10.251 ; P1.17 72.08,27.8 v1(73.66,26.22) ; C21.2@70.779,49.559 C21.2 ; C20.2@71.787,49.6 C20.2@71.797,49.59 ; v2(74.425,50.65) 74.425,50.585 74.05,50.21 74.05,48.35 U1.49 ; v2(75.16,2.71) 75.268,2.71 75.388,2.83 IC4.B1 ; IC4.B4 78.327,2.83 78.428,2.931 78.465,2.931 79.54,4.006 v3(79.54,5.19) ; C19.2 C19.2@78.55,40.51 ; U1.23 78.55,43.85 U1.49 ; U1.35 78.55,48.35 U1.49 ; v2(82.3,13.229) 82.6,13.53 IC3.B1 ; R16.1@84.3,43.25 R16.1 R16.1@84.433,43.117
  Top Layer w0.254: C9.2@65.947,25.827 66.12,26 C9.2 ; C10.2@65.957,24.867 66.13,25.04 C10.2 ; C12.2 C12.2@66.15,23.11 ; C11.2 C11.2@66.25,24.19
  Top Layer w0.3: R3.1@69.906,10.306 R3.1 ; C19.2 78.545,40.495 78.545,38.645 v3(78.55,38.64) ; C19.2@78.55,40.51 U1.23
  Top Layer w0.4: v2(69.807,49.559) C21.2@70.779,49.559 ; C21.2 C20.2@71.787,49.6
  Top Layer w0.5: C17.1 C18.1@54.77,51.52 ; R17.1 R3.1@69.96,10.251
  Top Layer w2: SuperCap3.2@57.9,23.56 SuperCap2.2
  Bottom Layer w0.2: v3@75.37,5.13 v3(75.36,5.14) v3@75.385,5.165 ; v3@79.515,5.165 v3(79.54,5.19) v3@79.565,5.165
  Bottom Layer w0.4: v2(75.16,2.71) 75.16,4.886 75.37,5.096 v3@75.37,5.13 ; v3@75.385,5.165 v3@79.515,5.165
  other v1: 69.725,0.75 71.975,0.75 74.225,0.75 76.475,0.75 78.725,0.75 80.975,0.75 45.5,2.5 48,2.5 50.5,2.5 53,2.5 55.5,2.5 58,2.5 60.5,2.5 63,2.5 65.5,2.5 73,2.5 80.5,2.5 46.75,5 49.25,5 51.75,5 54.25,5 56.75,5 59.25,5 61.75,5 64.25,5 69.25,5 84.25,5 45.5,7.5 48,7.5 50.5,7.5 53,7.5 55.5,7.5 58,7.5 60.5,7.5 63,7.5 65.5,7.5 73,7.5 75.5,7.5 83,7.5 46.75,10 49.25,10 51.75,10 54.25,10 56.75,10 59.25,10 61.75,10 64.25,10 74.25,10 76.75,10 84.25,10 69.59,12.21 45.5,12.5 48,12.5 50.5,12.5 53,12.5 55.5,12.5 58,12.5 60.5,12.5 63,12.5 65.5,12.5 73.711,12.522 75.39,14.49 77.85,14.61 46.75,15 49.25,15 51.75,15 54.25,15 56.75,15 59.25,15 61.75,15 64.25,15 66.75,15 69.25,15 71.75,15 84.25,15 80.525,15.25 45.5,17.5 48,17.5 50.5,17.5 53,17.5 55.5,17.5 58,17.5 60.5,17.5 63,17.5 65.5,17.5 68,17.5 46.75,20 49.25,20 51.75,20 54.25,20 56.75,20 59.25,20 61.75,20 64.25,20 66.75,20 69.25,20 71.75,20 74.25,20 65.583,21.488 78.69,21.49 80.525,22.075 45.5,22.5 48,22.5 63,22.5 69.748,22.809 73.52,24.01 78.42,24.14 75.184,24.841 46.75,25 54.25,25 61.75,25 64.25,25 84.25,25 45.5,27.5 48,27.5 53,27.5 55.5,27.5 58,27.5 60.5,27.5 63,27.5 83,27.5 78.71,27.99 46.75,30 49.25,30 54.25,30 56.75,30 59.25,30 61.75,30 64.25,30 76.75,30 84.25,30 78.486,30.429 66.421,30.683 65.126,31.547 45.5,32.5 48,32.5 53,32.5 55.5,32.5 58,32.5 60.5,32.5 63,32.5 78,32.5 83,32.5 76.18,33.75 46.75,35 49.25,35 54.25,35 56.75,35 59.25,35 61.75,35 64.25,35 81.75,35 84.25,35 72.873,36.627 75.76,37.31 45.5,37.5 48,37.5 53,37.5 55.5,37.5 58,37.5 60.5,37.5 63,37.5 65.5,37.5 68,37.5 78,37.5 83,37.5 68.326,39.014 72.365,39.319 84.92,39.45 76.022,39.548 46.75,40 49.25,40 54.25,40 56.75,40 59.25,40 61.75,40 64.25,40 81.75,40 44.825,41.15 72.365,41.935 63,42.5 65.5,42.5 80.5,42.5 55.2,42.75 85,44.27 55.2,45 61.75,45 73.92,45.41 74.72,45.41 75.52,45.41 76.32,45.41 77.12,45.41 77.92,45.41 78.72,45.41 74.36,46.16 75.16,46.16 75.96,46.16 76.76,46.16 77.56,46.16 78.36,46.16 73.92,46.91 74.72,46.91 75.52,46.91 76.32,46.91 77.12,46.91 77.92,46.91 78.72,46.91 49.88,47.14 48,47.5 58.61,48.28 62.87,48.29 46.51,48.4 49.08,48.55 82.825,48.6 66.08,49.05 48.06,49.16 64.08,49.77 49.25,50 52.43,51.63 59.55,52.15 66.65,52.275 51.82,53.12 53.72,53.12 55.62,53.12 57.52,53.12 44.88,53.27 47.98,53.36
  other v3: 61.163,43.307 82.652,49.86 80.761,49.873
HPD: IC2.10 U1.28 | length 33.2
  Top Layer w0.2: IC2.10 51.835,49.31 52.66,49.31 52.88,49.53 v2(53.69,49.53) ; U1.28 80.657,44.85 81.064,45.257 v2(81.075,45.257)
  Bottom Layer w0.2: v2(53.69,49.53) 55.62,47.6 79.67,47.6 81.075,46.195 v2(81.075,45.257)
JTCK-SWCLK: P3.2 U1.37 | length 6
  Top Layer w0.2: U1.37 79.05,49.3 79.1,49.25 79.35,49.25 83.791,49.25 84.451,48.59 P3.2
JTMS-SWDIO: P3.1 U1.34 | length 5.5
  Top Layer w0.2: U1.34 82.67,47.85 P3.1
LED_G: LED2.2 U1.27 | length 3.6
  Top Layer w0.2: U1.27 82.8,44.35 83.1,44.05 LED2.2
LED_R: LED1.2 U1.26 | length 2.1
  Top Layer w0.2: U1.26@79.75,43.9 81.425,43.9 81.7,43.625 LED1.2
Net*_0: *.0 U1.7 | length 13.5
  Top Layer w0.2: *.0 66.548,39.827 v2(66.548,46.279) ; v2(69.012,46.177) 69.12,46.177 69.447,45.85 U1.7
  Bottom Layer w0.2: v2(66.548,46.279) 67.516,46.279 67.725,46.069 68.796,46.069 68.904,46.177 v2(69.012,46.177)
NetC1_1: C1.1 P1.4 | length 2.8
  Top Layer w0.2: C1.1@67.29,34.42 67.362,34.348 P1.4@69.952,34.348
  Top Layer w0.254: P1.4@69.952,34.348 P1.4
NetC2_1: C2.1 P1.5 | length 3
  Top Layer w0.2: C2.1 67.333,33.413 67.693,33.413 68.005,33.725 69.925,33.725 P1.5
NetC3_1: C3.1 D3.1 L1.2 Q1.3 | length 8.1
  Top Layer w0.2: C3.1 74.355,21.925 75.273,21.007 D3.1 75.83,20.53 76.9,19.46 76.9,17.7
  Top Layer w0.3: L1.2 75.6,16.725 76.375,17.5 76.7,17.5 76.9,17.7
NetC3_2: C3.2 D1.1 D2.2 | length 4.7
  Top Layer w0.2: D2.2 69.177,20.994 D1.1 71.689,20.984 73.691,20.984 C3.2
NetC6_2: C6.2 IC3.A1 L1.1 | length 15.7
  Top Layer w0.2: L1.1@70.975,17.425 L1.1 71.8,16.475 72.625,15.65 72.75,15.65 75.43,12.97 81.06,12.97 IC3.A1
  Top Layer w0.3: C6.2 L1.1@70.975,17.425
NetC7_1: C7.1 P1.18 | length 3.3
  Top Layer w0.2: C7.1 67.04,27.92 67.24,27.72 67.445,27.72 67.865,27.3 P1.18
  Top Layer w0.254: P1.18@69.952,27.348 P1.18
NetC8_1: C8.1 P1.19 | length 3
  Top Layer w0.2: C8.1 67.7,26.97 67.865,26.805 69.965,26.805 P1.19@69.98,26.82
  Top Layer w0.254: P1.19@69.98,26.82 P1.19
NetC9_1: C9.1 P1.20 | length 3.1
  Top Layer w0.2: C9.1 67.601,26.01 67.891,26.3 P1.20
NetC10_1: C10.1 P1.22 | length 3.1
  Top Layer w0.2: C10.1 67.577,25.05 67.827,25.3 P1.22
NetC13_2: C13.2 IC1.A1 P5.1 | length 23.9
  Top Layer w0.2: IC1.A1 C13.2 73.565,14.34 75.285,12.62 82.66,12.62 83.17,13.13 P5.1
NetC14_2: C14.2 IC1.B1 IC1.B2 L2.1 P6.2 | length 19.4
  Top Layer w0.2: P6.2 66.83,11.79 67.24,12.2 IC1.B1 68.076,12.2 68.08,12.196 68.08,10.04 67.79,9.75 C14.2@67.79,8.37
  Top Layer w0.4: C14.2 67.99,8.37 70.43,8.37 71.89,9.83 L2.1
NetC24_1: C24.1 IC4.A1 IC4.C1 P7.2 | length 10.2
  Top Layer w0.2: P7.2 73.79,3.41 C24.1 73.81,2.84 74.49,2.16 75.547,2.16 75.717,2.33 IC4.C1 ; C24.1@73.82,3.39 73.88,3.33 IC4.A1
NetIC1_A2: IC1.A2 L2.2 | length 4.3
  Top Layer w0.2: IC1.A2 68.083,12.603 68.083,12.943 68.42,13.28 L2.2
NetIC1_B3: IC1.B3 R3.2 R17.2 | length 3.1
  Top Layer w0.2: IC1.B3 68.48,11.5 68.86,11.12 R3.2
  Top Layer w0.5: R17.2 R3.2
NetIC3_A2: IC3.A2 P4.2 | length 14.4
  Top Layer w0.2: v2(78.55,13.6) 80.86,13.6 81.77,14.51 IC3.A2
  Bottom Layer w0.2: v2@78.55,13.6 78.55,8.227 80.716,6.06 P4.2
NetIC4_C2: IC4.C2 P6.1 | length 10.7
  Top Layer w0.2: P6.1 76.844,1.81 77.281,2.247 77.281,2.311 IC4.C2
NetLED1_1: LED1.1 R15.2 | length 2.2
  Top Layer w0.2: LED1.1 81.7,41.3 82.1,40.9 R15.2
NetLED2_1: LED2.1 R16.2 | length 1.4
  Top Layer w0.2: LED2.1 83.3,42.05 R16.2
NetP8_1: P8.1 U1.32 | length 21
  Top Layer w0.2: U1.32 80.475,46.85 80.804,47.179 v2(80.88,47.179)
  Bottom Layer w0.2: P8.1 64.36,50.58 64.99,49.95 68.487,49.95 70.337,48.1 79.959,48.1 v2(80.88,47.179)
NetP9_2: P9.2 SuperCap2.1 SuperCap3.1 | length 25.9
  Top Layer w0.2: SuperCap3.1@51.19,23.64 SuperCap3.1@51.285,23.545 ; SuperCap3.1@51.28,23.54 SuperCap3.1@51.3,23.56 ; SuperCap3.1@51.28,23.598 SuperCap3.1@51.282,23.596
  Top Layer w0.9: P9.2 SuperCap2.1@51.18,43.82
  Top Layer w2: SuperCap3.1@51.3,23.56 SuperCap2.1
NetR7_1: R7.1 Z1.2 | length 1.9
  Top Layer w0.2: Z1.2 57.63,47.1 Z1.2@57.73,47
  Top Layer w0.3: Z1.2@57.73,47 R7.1
NFC_Vcc: C25.1 IC2.9 P8.2 R4.2 R5.2 | length 20.2
  Top Layer w0.2: IC2.9 54.88,48.9 v2(55.28,49.3)
  Top Layer w0.4: v2(61.82,49.61) 62.92,49.61 65.111,47.419 65.111,46.9 65.19,46.821 R4.2
  Top Layer w0.5: C25.1 65.19,46.52 R4.2
  Bottom Layer w0.4: v2(55.28,49.3) 56.494,49.3 56.804,49.61 v2(61.82,49.61) P8.2
PREVGH: C5.2 D3.2 P1.21 | length 10.1
  Top Layer w0.2: P1.21 72.9,25.8 75.83,22.87 D3.2 77.653,21.673 C5.2 C5.2@77.646,21.694
PREVGL: C11.1 D1.2 P1.23 | length 9
  Top Layer w0.2: C11.1 67.257,24.277 67.497,24.277 67.945,24.725 69.925,24.725 P1.23 72.05,24.8 72.61,24.24 72.61,23.41 71.68,22.48 D1.2
RES: P1.10 U1.11 | length 18.5
  Top Layer w0.2: v2(66.84,32.03) 67.57,31.3 P1.10 ; v2(69.11,37.62) 69.96,37.62 71.659,39.319 71.659,43.088 72.371,43.8 72.8,43.8 U1.11
  Bottom Layer w0.2: v2(66.84,32.03) 66.84,35.35 v2(69.11,37.62)
RESE: P1.3 Q1.2 R2.2 | length 23
  Top Layer w0.15: Q1.2 79.375,18.975 R2.2
  Top Layer w0.2: P1.3 72.31,34.8 v2(72.89,34.22) ; v2(74.843,28.898) 79.5,24.241 R2.2
  Bottom Layer w0.2: v2(72.89,34.22) 74.843,32.267 v2(74.843,28.898)
SCL1: IC2.7 R4.1 U1.30 | length 36.5
  Top Layer w0.2: IC2.7 51.4,47.865 51.885,47.38 v2(52.77,47.38) ; U1.30 81.445,45.85 81.617,46.022 v2(81.725,46.022)
  Top Layer w0.4: v2(62.813,46.817) R4.1@64.073,46.817
  Bottom Layer w0.2: v2(52.77,47.38) 54.88,47.38 55.443,46.817 v2(62.813,46.817) 64.944,44.686 81.282,44.686 81.725,45.13 v2(81.725,46.022)
SCL2: IC4.C4 R12.1 U1.21 | length 45.1
  Top Layer w0.2: v2(76.53,40.44) 76.53,40.478 76.9,40.848 76.9,41.319 77.55,41.969 U1.21 ; IC4.C4@78.319,2.349 IC4.C4 78.327,2.33 78.428,2.431 78.465,2.431 80.49,4.456 v2(80.49,9.13) 78.75,9.13 R12.1
  Bottom Layer w0.2: v2(76.53,40.44) 76.53,40.332 76.708,40.154 76.708,35.782 79.9,32.59 79.9,9.72 v2(80.49,9.13)
SCLK: P1.13 U1.15 | length 16.5
  Top Layer w0.2: P1.13@70.075,29.875 P1.13 72.795,29.8 74.55,31.555 U1.15
SDA1: IC2.6 R5.1 U1.31 | length 39.5
  Top Layer w0.2: IC2.6 51,47.72 51.93,46.79 v2(51.975,46.79) ; U1.31 81.275,46.35 v2(82.042,47.117)
  Top Layer w0.4: v2(62.85,45.55) R5.1
  Bottom Layer w0.2: v2(51.975,46.79) 52.415,46.35 62.05,46.35 v2(62.85,45.55) 64.064,44.336 81.427,44.336 82.275,45.185 82.275,46.8 82.042,47.033 v2@82.042,47.103
SDA2: IC4.C3 R10.1 U1.22 | length 47.2
  Top Layer w0.2: v2(77.47,39.903) 77.393,39.98 77.393,41.317 78.001,41.925 78.001,42.601 U1.22 ; IC4.C3@77.819,2.311 IC4.C3 77.8,2.303 77.901,2.202 77.901,2.165 78.135,1.931 78.465,1.931 81.14,4.606 v2(81.14,10.44) 78.76,10.44 R10.1 R10.1@78.67,10.35
  Bottom Layer w0.2: v2(77.47,39.903) 77.47,37.993 77.28,37.803 77.28,36 81.14,32.14 v2(81.14,10.44)
SDI: P1.14 U1.17 | length 17.3
  Top Layer w0.2: P1.14 72.79,29.3 74.986,31.496 74.986,41.658 75.5,42.171 75.5,42.6 U1.17
USART1_CTS: P2.2 U1.40 | length 3.4
  Top Layer w0.2: U1.40 77.55,50.82 P2.2
USART1_RTS_DE: P2.6 U1.39 | length 11.2
  Top Layer w0.2: U1.39 78.05,50.392 78.2,50.542 v2(78.2,50.65)
  Bottom Layer w0.2: P2.6 70.07,51.2 77.76,51.2 77.901,51.059 77.901,51.057 78.2,50.758 v2(78.2,50.65)
USART1_RX: P2.5 U1.43 | length 6.4
  Top Layer w0.2: P2.5 72.56,51.25 75.505,51.25 76.05,50.705 U1.43
USART1_TX: P2.4 U1.42 | length 4.4
  Top Layer w0.2: P2.4 74.033,52.317 74.933,52.317 76.55,50.7 U1.42
Vcap: D4.1 P4.1 P7.1 P9.1 R6.2 R8.2 R13.2 U1.1 Z1.1 | length 91.7
  Top Layer w0.2: Z1.1@56.83,47 56.93,47.1 Z1.1 ; D4.1@57.857,50.23 58.307,50.68 D4.1 D4.1@58.71,50.56 ; R13.2@68.54,42.01 R13.2
  Top Layer w0.3: v2(67.775,48.9) 68.518,48.9 68.63,49.012 69.505,49.012 69.667,48.85 U1.1
  Top Layer w0.4: P9.1 45.77,46.14 52.72,46.14 53.43,46.85 53.78,46.85 53.88,46.95 R6.2 Z1.1@56.83,47 ; Z1.1 56.93,49.02 57.857,49.947 D4.1@57.857,50.23 ; D4.1@58.71,50.56 R8.2@68.6,50.56 ; v2(68.54,40.25) R13.2@68.54,42.01 ; R13.2 68.566,42.064 67.896,42.064 67.163,42.797 67.163,45.556 67.775,46.168 v2(67.775,48.9) 67.813,48.938 67.813,49.288 68.519,49.994 68.519,50.479 R8.2@68.6,50.56 ; R8.2 R8.2@68.6,50.56
  Bottom Layer w0.4: v2(68.54,40.25) 70.54,38.25 P7.1 80.19,5.95 P4.1
VCOM: C12.1 P1.24 | length 3.7
  Top Layer w0.2: C12.1 67.81,23.1 68.41,23.7 68.41,24.225 68.485,24.3 P1.24
Vdd: C4.1 C19.1 C20.1 C21.1 C22.1 P1.15 P1.16 P2.3 R8.1 R9.2 R10.2 R11.1 R12.2 U1.24 U1.36 U1.48 | length 81.6
  Top Layer w0.2: C4.1@66.9,28.975 C4.1@66.9,29.04 ; C20.1 71.83,50.55 v2(73.025,50.55) 73.102,50.473 73.267,50.473 73.55,50.19 U1.48 ; R10.2 R10.2@77.63,10.39
  Top Layer w0.254: C4.1@66.89,29.05 C4.1@66.9,29.04
  Top Layer w0.3: C4.1 67.14,28.8 P1.15 72.99,28.8 79.49,35.3 R9.2 ; P1.16 73.01,28.3 v2(73.54,27.77) ; U1.24 79.05,42.375 79.369,42.056 79.369,41.66 C22.1@79.495,41.535 ; U1.36 81.346,48.85 81.556,48.64 v2(81.61,48.64)
  Top Layer w0.4: R10.2 v2(77.62,11.7) ; R11.1 R12.2 R10.2@77.63,10.39
  Top Layer w0.5: R8.1 69.79,50.52 C21.1 ; P1.16@70,28.4 70,28.6 ; C21.1@70.83,50.51 C20.1 ; C19.1 C22.1 v2(80.48,41.5) ; R9.2 C19.1@79.49,40.47
  Bottom Layer w0.2: v2(73.025,50.55) 73.037,50.538 73.037,50.113 74.51,48.64 v2(81.61,48.64) 81.61,50.41 80.83,51.19 78.56,51.19 77.473,52.277 76.613,52.277 P2.3
  Bottom Layer w0.3: v2(80.48,41.5) 82.675,43.695 82.675,47.575 v2(81.61,48.64)
  Bottom Layer w0.4: v2(73.54,27.77) 76.67,24.64 76.67,12.65 v2(77.62,11.7)
Vref+: C23.1 D5.2 R14.1 U1.9 | length 5.7
  Top Layer w0.2: R14.1@68.49,43.25 R14.1 ; C23.1 C23.1@68.55,44.27
  Top Layer w0.3: D5.2 70.958,44.27 71.538,44.85 U1.9
  Top Layer w0.4: C23.1@68.55,44.27 D5.2
  Top Layer w0.5: R14.1@68.49,43.25 C23.1
X1: IC4.A3 X1.1 | length 2.2
  Top Layer w0.2: X1.1 77.792,5.473 77.792,3.337 IC4.A3
X2: IC4.A2 X1.3 | length 3.1
  Top Layer w0.2: IC4.A2 77.3,4.4 76.96,4.74 76.96,5.784 77.156,5.98 77.31,5.98 77.335,6.005 X1.3
XTAL32IN: U1.3 X2.1 | length 3.4
  Top Layer w0.2: X2.1 71.005,47.585 71.27,47.85 U1.3
XTAL32OUT: U1.4 X2.3 | length 4.3
  Top Layer w0.2: X2.3 69.075,47.135 69.1,47.11 69.1,46.956 69.296,46.76 70.675,46.76 71.265,47.35 U1.4
pads on no net: ANT1. IC2.3 IC2.4 IC2.5 IC2.13 IC2.16 IC4.B2 IC4.B3 P1.1 P1.6 P1.7 U1.5 U1.6 U1.16 U1.20 U1.25 U1.29 U1.33 U1.38 U1.41 U1.45 U1.46 X1.4 X2.4
copper on no net:
  other v2: 36.618,45.793

## Polygon pours and split planes (outlines as drawn)
GND on Bottom Layer "GND_L02_P001" (solid, remove dead copper, pour order 1): 44.26,54.86 44.26,41.65 44.26,0 64.53,0 86.35,0 86.35,54.07
GND on Bottom Layer "GND_L02_P004" (solid, pour order 4): 57.28,48.62 57.29,48.61 64.12,48.61 64.94,47.79 57.27,47.79
GND on Top Layer "GND_L01_P003" (solid, remove dead copper, pour order 3): 44.26,54.86 44.26,41.65 44.26,0 64.53,0 86.35,0 86.35,54.07

## Other copper
Top Layer:
  pour cut-out: 79.796,39.01 79.773,38.987 79.773,35.183 80.242,35.183 80.233,35.192 80.233,38.984
  pour cut-out: 69.16,42.73 68.06,42.73 68.06,44.71 68.19,44.84 68.19,45.42 68.071,45.42 67.801,45.69 67.52,45.409 67.52,42.944 67.965,42.5 69.182,42.5
  pour cut-out: 72.74,13.83 72.445,13.535 68.314,13.535 68.052,13.273 67.945,13.38 67.945,13.89 67.971,13.89 68.171,14.09 72.74,14.09
  pour cut-out: 73.115,43.05 73.33,43.05 73.33,37.8 73.03,38.1 73.03,42.965
Bottom Layer:
  pour cut-out: 55.18,47.44 62.67,47.44 62.893,47.217 62.813,47.138 62.813,47.03 55.59,47.03
  pour cut-out: 52.38,46.82 52.543,46.983 52.543,47.041 52.997,47.041 53.07,47.114 53.07,46.48 52.6,46.48 52.596,46.485
  pour cut-out: 77.027,24.64 77.217,24.45 77.31,24.45 77.31,23.66 77.24,23.73 76.91,23.73 76.91,24.523
  pour cut-out: 72.93,33.82 72.93,33.356 73.239,33.047 73.422,33.23 73.52,33.23
  pour cut-out: 73.369,34.44 73.369,34.26 73.29,34.18 75.078,32.392 75.078,32.478 75.21,32.61 73.38,34.44

## Silkscreen, mask and mechanical layers (free items; w line width, h text height)
Bottom Overlay:
  text "GND CTS VDD TX  RX  DE" at 82.931,50.241 h0.7
  text "SWCLK /  / SWEDIO" at 83.109,45.491 h0.7
  text "Kevin V1.0" at 63.987,2.917 h2
  text "2025-04-09" at 64.144,1.258 h1

## Text inside footprints (layer, text, board x,y; h text height)
SuperCap2: Top Overlay "+" at 47.554,43.69 h1.52; Top Overlay "-" at 60.554,43.182 h1.52
SuperCap3: Top Overlay "+" at 47.554,23.097 h1.52; Top Overlay "-" at 60.554,22.589 h1.52